# Altium PCB GDT_Trafo.PcbDoc
Units mm, origin at the board's own origin, x right, y up, seen from the top; angles counter-clockwise.
Board outline 45 x 60 mm, 2 copper layers (Top Layer, Bottom Layer); 5 components, 10 nets, 26 pads, 0 vias.
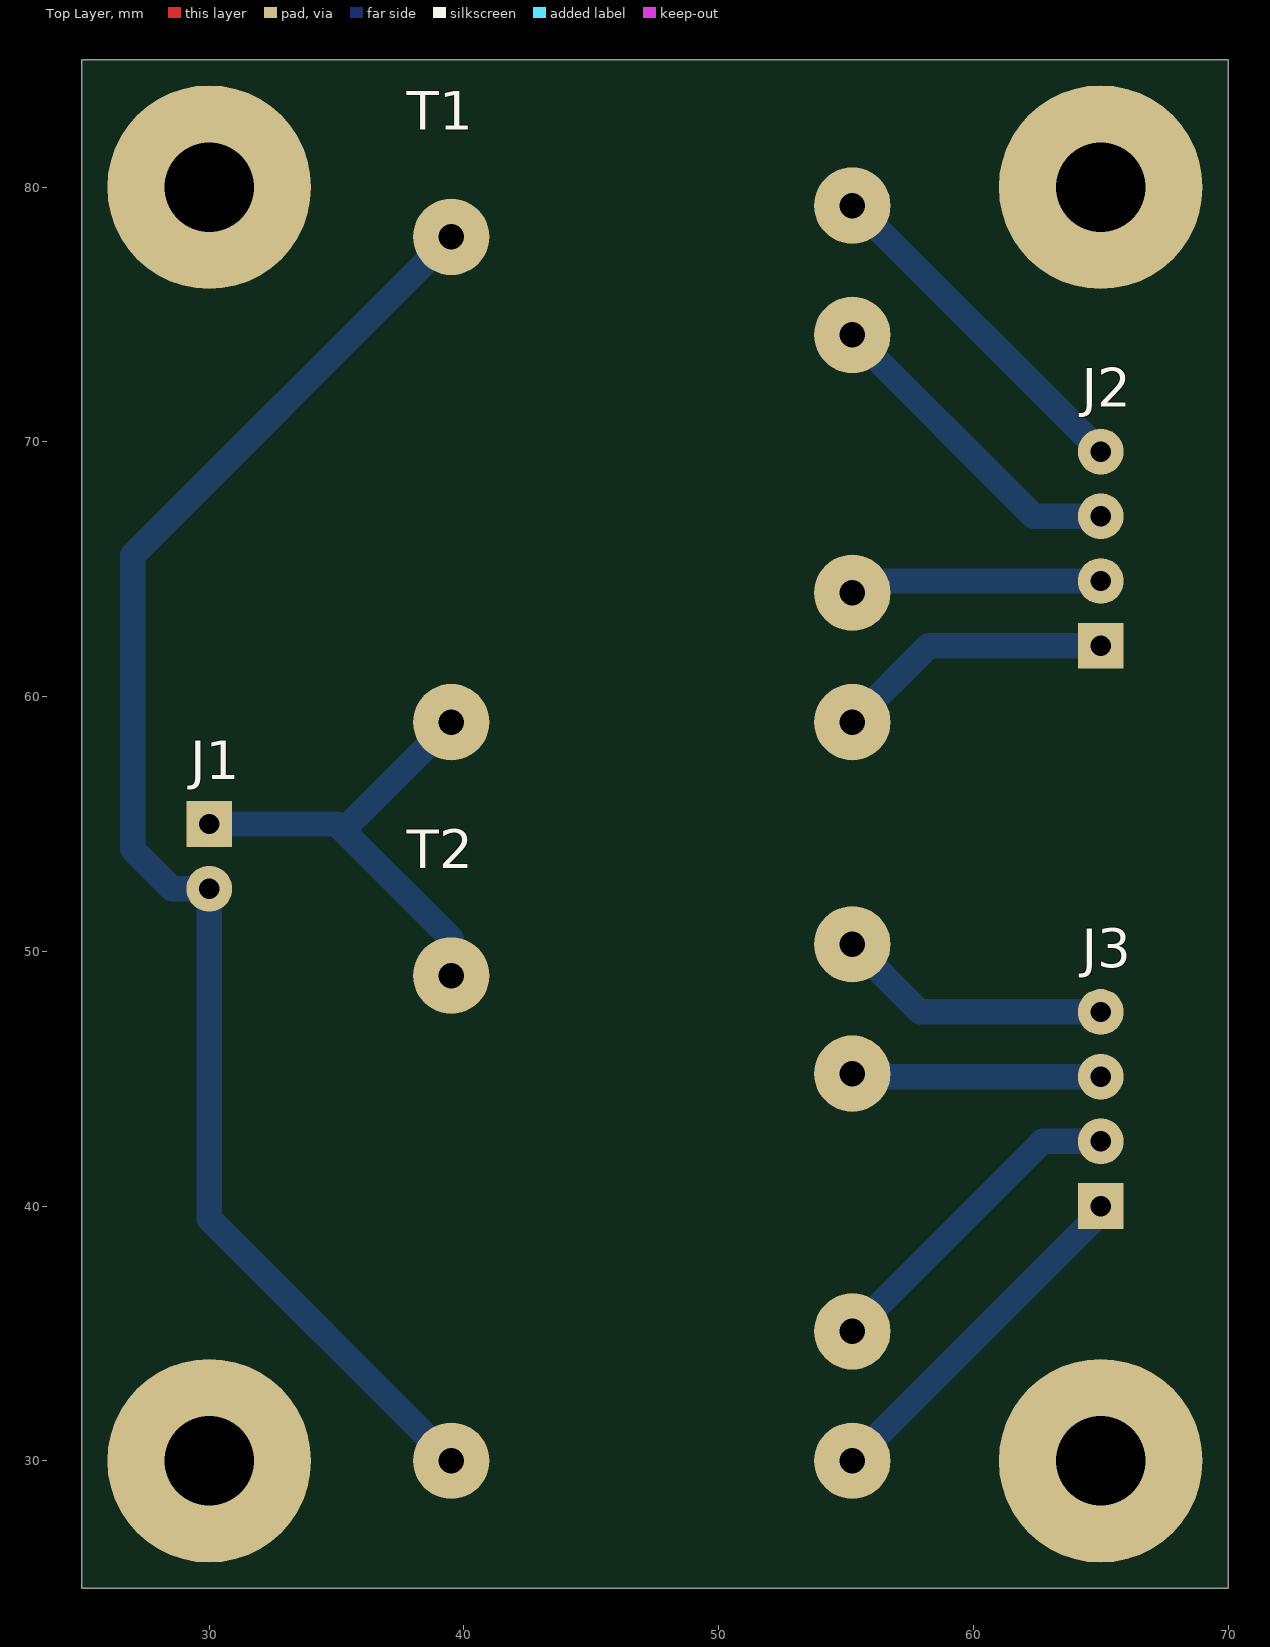
[diagram p0: Top Layer view]
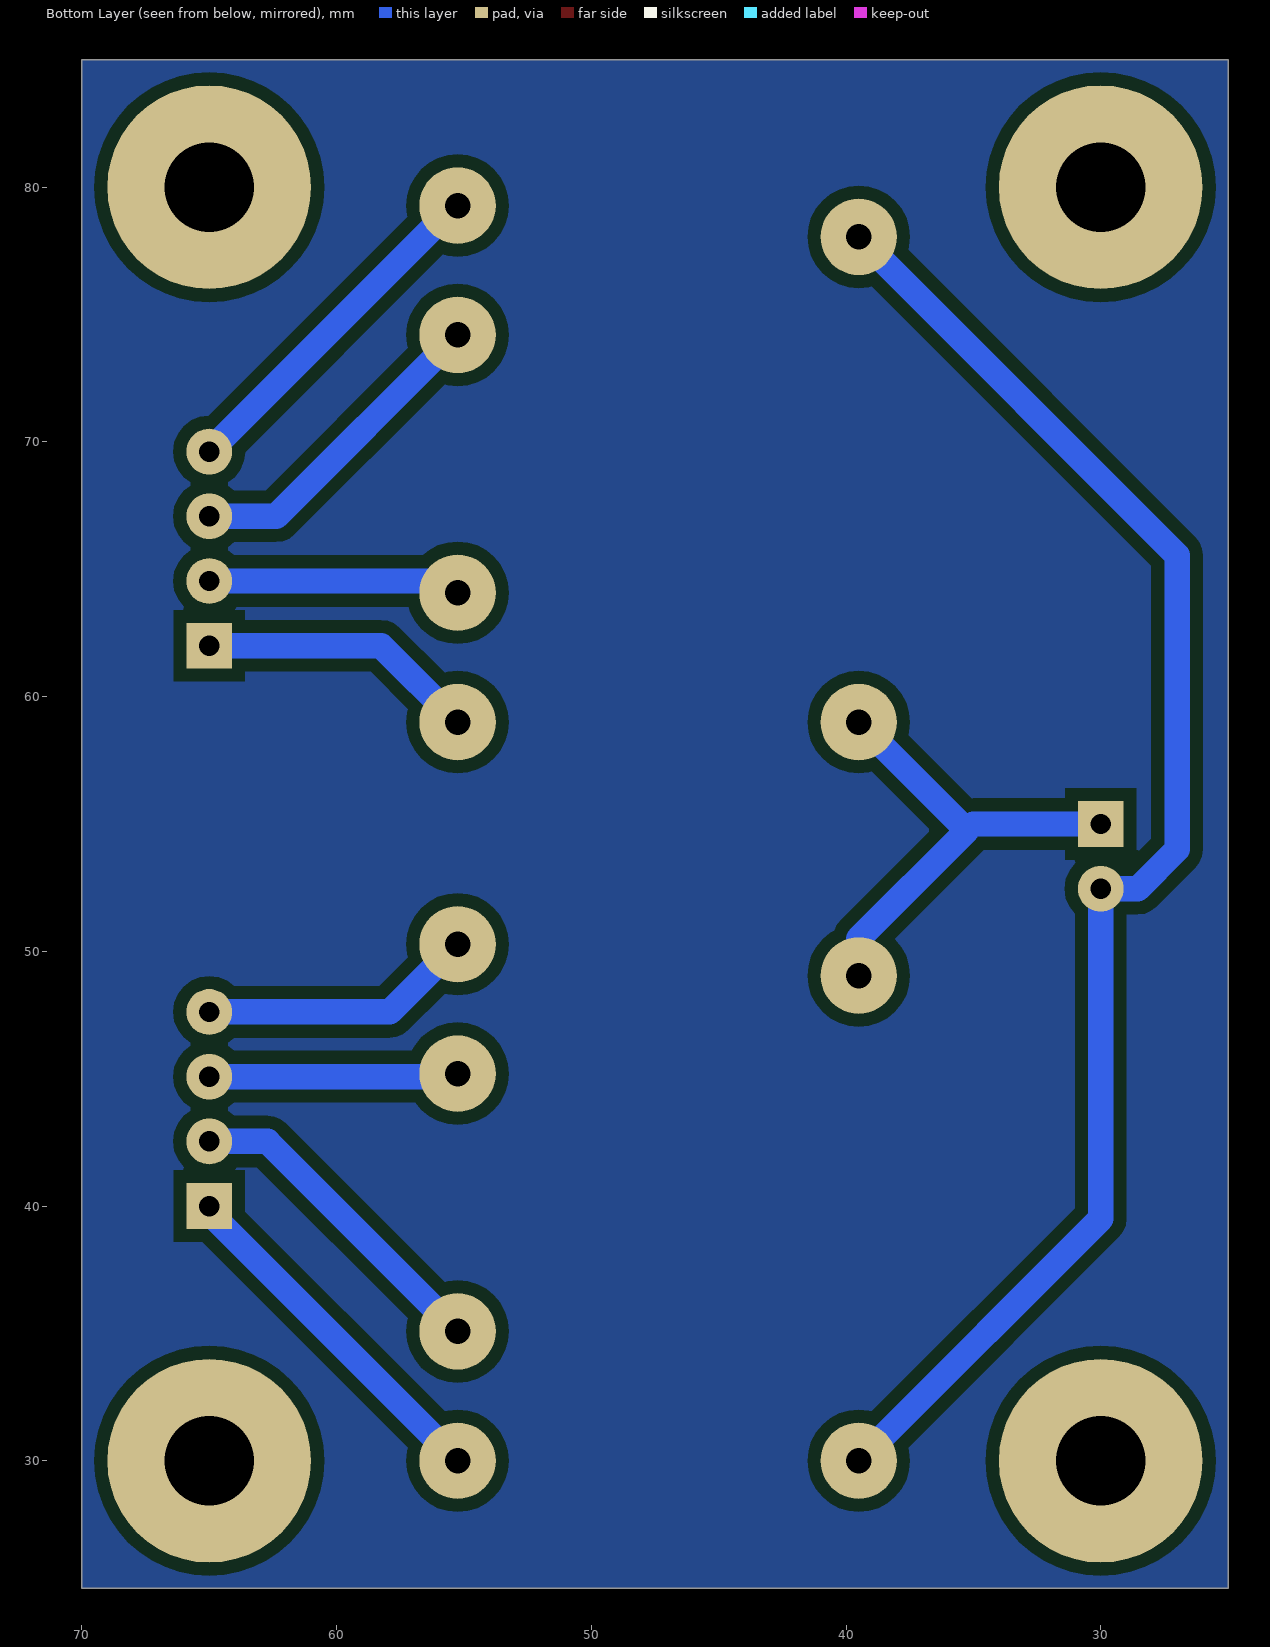
[diagram p1: Bottom Layer view, seen from below]

## Layer stack, top to bottom
Top Layer: signal copper 0.0356
Dielectric: dielectric 0.32, FR-4, Dk 4.8
Bottom Layer: signal copper 0.0356

## Board outline
25,25 25,85 70,85 70,25 25,25

## Design rules (kind name [scope] priority, off if disabled: settings)
Clearance [All] p1: gap=0.5
Height [All] p1: minheight=0 maxheight=100 prefheight=12.7
PolygonConnect [All] p1: connectstyle=Relief reliefconductorwidth=0.254 reliefentries=4 polygonreliefangle="90 Angle" airgapwidth=0.254
RoutingVias [All] p1: holewidth=0.711 width=1.27 viastyle="Through Hole" minholewidth=0.711 minwidth=1.27 maxholewidth=0.711 maxwidth=1.27
SolderMaskExpansion [All] p1: expansion=0.102
Width [All] p1: maxlimit=5 minlimit=0.4 preferedwidth=1
27 further rules are at their usual default settings.

## Components (designator, comment, footprint, x,y, rotation, side; value= is the part's Value field where it differs from the comment)
J1 "JST 2pin" "JST 2pin" 30,55 r180 top
J2 "JST 4pin" "JST 4pin" 65,62 r0 top
J3 "JST 4pin" "JST 4pin" 65,40 r0 top
T1 "GDT 1:1:1" SD250-3 39.5,59 r0 top
T2 "GDT 1:1:1" SD250-3 39.5,30 r0 top

## Footprints (in the part's own frame and the unit in brackets; to place one, negate y for a bottom-side part, rotate by r counter-clockwise, add the part's x,y. Pads: shape width x height; smd on the part's side, far side on the other; paste and mask are expansions set on the pad)
"JST 2pin" [mm]
  rect 1.8x1.8 hole 0.8: 1(0,0)
  round 1.8 hole 0.8: 2(0,2.54)
"JST 4pin" [mm]
  rect 1.8x1.8 hole 0.8: 1(0,0)
  round 1.8 hole 0.8: 2(0,2.54) 3(0,5.08) 4(0,7.62)
SD250-3 [mm]
  round 3 hole 1: 1(0,0) 5(0,19.05) 6(15.75,0) 7(15.75,5.08) 9(15.75,15.2) 10(15.75,20.28)
  body extent -2,-2.5 18,22.5, height 30

## Free pads (board coordinates)
  round 8 hole 3.5: 0(30,30) 1(30,80) 2(65,80) 3(65,30)

## Nets (pads, with @x,y where several pads share a name; then routed paths per layer and width w, separated by ;. In a path a pad name is that pad's centre, name@x,y a point inside that pad or via, vN(x,y) a via of type N, cw(c..) or ccw(c..) an arc to the next point about the centre after c; other vN are vias at no path point)
NetJ1_1: J1.1 T1.1 T2.5 | length 18.5
  Bottom Layer w1: J1.1 35,55 ; T2.5@39,49.05 39.5,49.55 39.5,50.5 35.25,54.75 39,58.5 T1.1@39,59
NetJ1_2: J1.2 T1.5 T2.1 | length 58.8
  Bottom Layer w1: T2.1@39,30 39,30.5 30,39.5 J1.2 28.54,52.46 27,54 27,65.55 39,77.55 T1.5@39,78.05
NetJ2_1: J2.1 T1.6 | length 11.5
  Bottom Layer w1: T1.6@54.75,59 T1.6 58.25,62 J2.1
NetJ2_2: J2.2 T1.7 | length 10.4
  Bottom Layer w1: T1.7@54.75,64.08 55.21,64.54 J2.2
NetJ2_3: J2.3 T1.9 | length 13.2
  Bottom Layer w1: T1.9@54.75,74.2 T1.9 62.37,67.08 J2.3
NetJ2_4: J2.4 T1.10 | length 14.3
  Bottom Layer w1: T1.10@54.75,79.28 55.34,79.28 J2.4
NetJ3_1: J3.1 T2.6 | length 14.5
  Bottom Layer w1: T2.6@54.75,30 T2.6 65,39.75 J3.1
NetJ3_2: J3.2 T2.7 | length 13.3
  Bottom Layer w1: T2.7@54.75,35.08 T2.7 62.71,42.54 J3.2
NetJ3_3: J3.3 T2.9 | length 10.3
  Bottom Layer w1: T2.9@54.75,45.2 54.87,45.08 J3.3
NetJ3_4: J3.4 T2.10 | length 11.4
  Bottom Layer w1: T2.10@54.75,50.28 T2.10 57.91,47.62 J3.4

## Polygon pours and split planes (outlines as drawn)
no net on Bottom Layer "B" (solid, pour order 2): 25,25 25,85 70,85 70,25 25,25